# EAGLE board parallel (EAGLE 5.02)
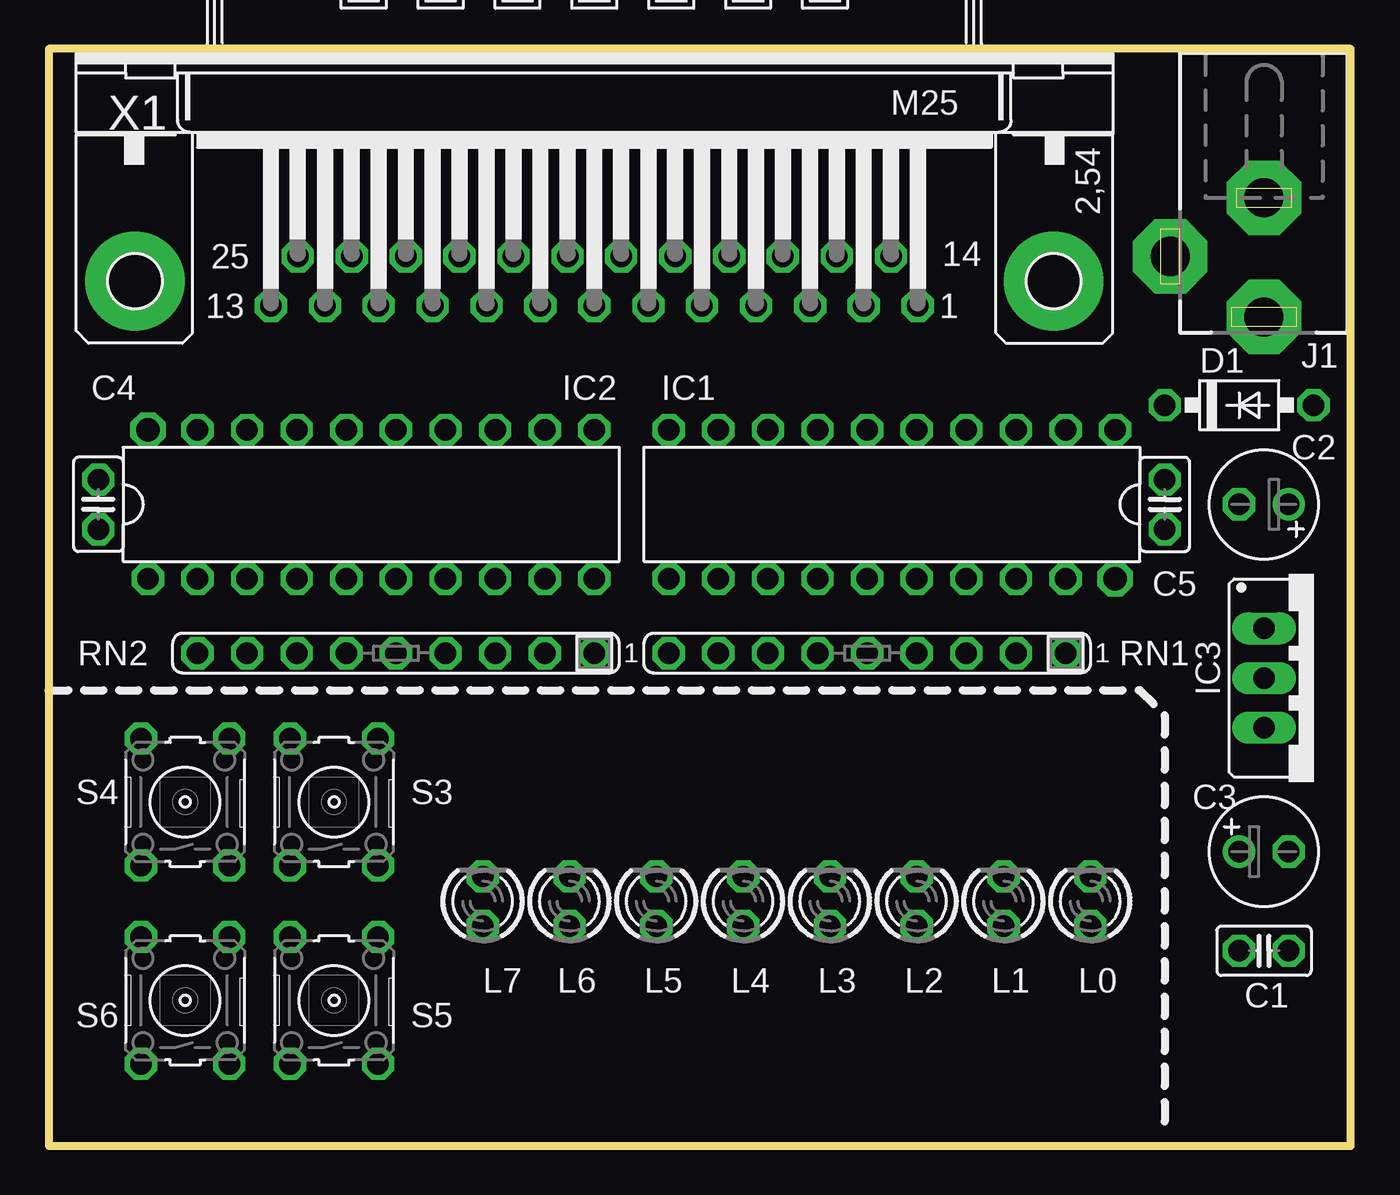
[diagram p0: board, top side]
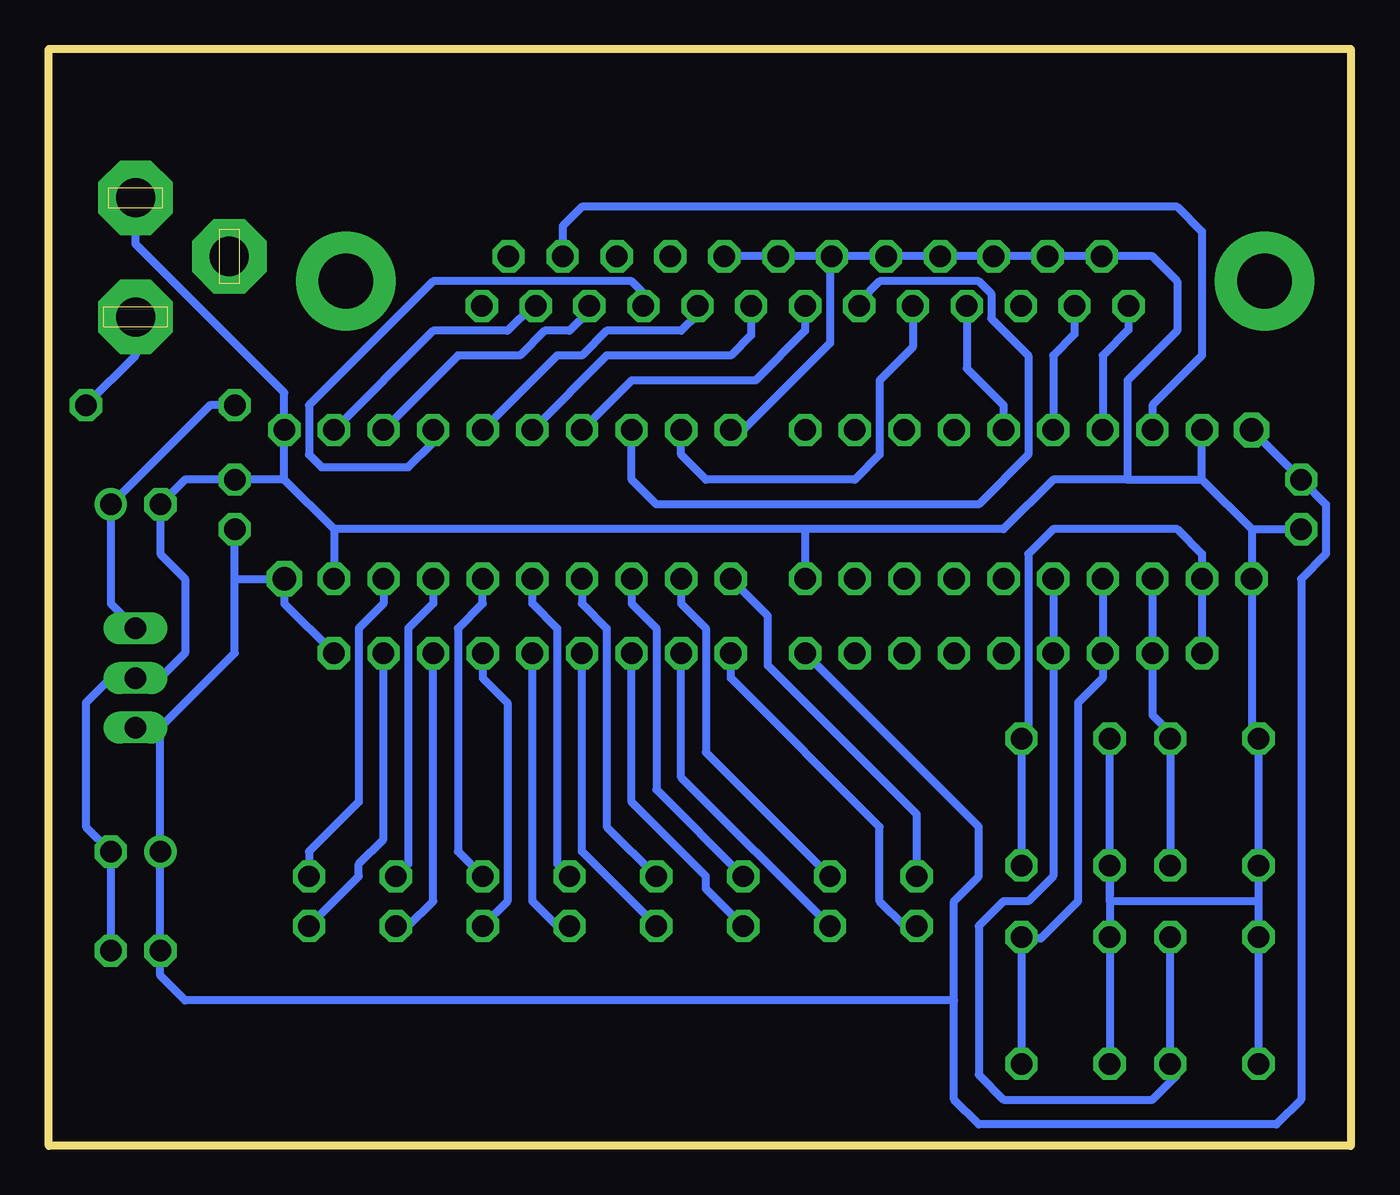
[diagram p1: board, bottom side, seen from below]

Size 66.67 x 56.19 mm. Coordinates in mm from the lower left corner, seen from the top.
Outline: 0,56.19 0,0 66.67,0 66.67,56.19 0,56.19
Copper layers (1*16): Top 0.035mm / dielectric 1.5mm / Bottom 0.035mm
Design rules "default": minimum track width 10mil, minimum drill 24mil, track to track 8mil, track to pad 8mil, pad to pad 8mil, via to via 8mil, smd to smd 8mil, copper to edge 40mil, drill to drill 8mil, minimum pad ring 10mil, minimum via ring 8mil, stop-mask expansion 4mil, vias tented up to drill 0mil, thermal gap 10mil

## Footprints (pad centres in the part's own frame; a part is rotated, then mirrored left to right if it is on the bottom)
C025-025X050 = drill 1.1 octagon: 1 -1.27,0; 2 1.27,0
E2,5-6 = drill 1.1 round: + -1.27,0 | drill 1.1 pad 1.6 octagon: - 1.27,0
DO41-10 = drill 1.1 octagon: A 3.81,0; C -3.81,0
DIL20 = drill 1.1 octagon: 1 -11.43,-3.81; 2 -8.89,-3.81; 3 -6.35,-3.81; 4 -3.81,-3.81; 5 -1.27,-3.81; 6 1.27,-3.81; 7 3.81,-3.81; 8 6.35,-3.81; 9 8.89,-3.81; 10 11.43,-3.81; 11 11.43,3.81; 12 8.89,3.81; 13 6.35,3.81; 14 3.81,3.81; 15 1.27,3.81; 16 -1.27,3.81; 17 -3.81,3.81; 18 -6.35,3.81; 19 -8.89,3.81 | drill 1.2 octagon: 20 -11.43,3.81
78XXS = drill 1.1 long: GND 0,-2.54; IN -2.54,-2.54; OUT 2.54,-2.54
DCJ0202A = drill 2 pad 3.81 octagon: 1 0,3.1; 2 4.8,0; 3 0,-3
LED3MM = drill 1.1 octagon: A -1.27,0; K 1.27,0
SIL9 = drill 1.1 octagon: 1 -10.16,0; 2 -7.62,0; 3 -5.08,0; 4 -2.54,0; 5 0,0; 6 2.54,0; 7 5.08,0; 8 7.62,0; 9 10.16,0
B3F-10XX = drill 1.1 octagon: 1 -3.251,2.261; 2 3.251,2.261; 3 -3.251,-2.261; 4 3.251,-2.261
M25HP = drill 1.1 octagon: 1 -16.561,1.27; 2 -13.792,1.27; 3 -11.049,1.27; 4 -8.28,1.27; 5 -5.512,1.27; 6 -2.769,1.27; 7 0,1.27; 8 2.769,1.27; 9 5.512,1.27; 10 8.28,1.27; 11 11.049,1.27; 12 13.792,1.27; 13 16.561,1.27; 14 -15.189,-1.27; 15 -12.421,-1.27; 16 -9.652,-1.27; 17 -6.909,-1.27; 18 -4.14,-1.27; 19 -1.372,-1.27; 20 1.372,-1.27; 21 4.14,-1.27; 22 6.909,-1.27; 23 9.652,-1.27; 24 12.421,-1.27; 25 15.189,-1.27 | drill 2.8 pad 5.08 round: G1 -23.52,0; G2 23.52,0

## Placement (x,y rotation side)
C1  [C025-025X050]  62.22,10 0 top
C2  [E2,5-6]  62.22,32.86 180 top
C3  [E2,5-6]  62.22,15.08 0 top
C4  [C025-025X050]  2.54,32.86 270 top
C5  [C025-025X050]  57.14,32.86 90 top
D1  1N4004A  [DO41-10]  60.95,37.94 0 top
IC1  74LS541N  [DIL20]  43.17,32.86 180 top
IC2  74LS541N  [DIL20]  16.51,32.86 0 top
IC3  [78XXS]  64.77,23.96 270 top
J1  DCJ0202  [DCJ0202A]  62.22,45.55 180 top
L0  [LED3MM]  53.34,12.54 90 top
L1  [LED3MM]  48.89,12.54 90 top
L2  [LED3MM]  44.45,12.54 90 top
L3  [LED3MM]  40,12.54 90 top
L4  [LED3MM]  35.55,12.54 90 top
L5  [LED3MM]  31.11,12.54 90 top
L6  [LED3MM]  26.67,12.54 90 top
L7  [LED3MM]  22.22,12.54 90 top
RN1  [SIL9]  41.9,25.23 180 top
RN2  [SIL9]  17.78,25.23 180 top
S3  [B3F-10XX]  14.6,17.62 90 top
S4  [B3F-10XX]  6.98,17.62 90 top
S5  [B3F-10XX]  14.6,7.46 90 top
S6  [B3F-10XX]  6.98,7.46 90 top
X1  [M25HP]  27.94,44.29 180 top

## Library data of the parts
C1-C5 D1 IC1-IC3 J1 L0 L1-L7 RN1 RN2 S3-S6 X1 = parallel

## Nets
+5V: C1.1 C3.+ C4.1 C5.1 IC1.20 IC2.20 IC3.OUT RN1.1 RN2.1
GND: C1.2 C2.- C3.- C4.2 C5.2 IC1.1 IC1.10 IC1.19 IC2.1 IC2.10 IC2.19 IC3.GND J1.3 S3.1 S3.2 S4.1 S4.2 S5.1 S5.2 S6.1 S6.2 X1.18 X1.19 X1.20 X1.21 X1.22 X1.23 X1.24 X1.25
N$1: IC1.2 X1.2
N$2: IC1.3 X1.3
N$3: IC1.4 X1.4
N$4: IC1.5 X1.5
N$5: IC1.6 X1.6
N$6: IC1.7 X1.7
N$7: IC1.8 X1.8
N$8: IC1.9 X1.9
N$9: IC1.18 L0.K
N$10: IC1.17 L1.K
N$11: IC1.16 L2.K
N$12: IC1.15 L3.K
N$13: IC1.14 L4.K
N$14: IC1.13 L5.K
N$15: IC1.12 L6.K
N$16: IC1.11 L7.K
N$17: L0.A RN1.2
N$18: L1.A RN1.3
N$19: L2.A RN1.4
N$20: L3.A RN1.5
N$21: L4.A RN1.6
N$22: L5.A RN1.7
N$23: L6.A RN1.8
N$24: L7.A RN1.9
N$25: IC2.2 RN2.9 S3.3 S3.4
N$26: IC2.3 RN2.8 S4.3 S4.4
N$27: IC2.4 RN2.7 S5.3 S5.4
N$28: IC2.5 RN2.6 S6.3 S6.4
N$33: IC2.15 X1.10
N$34: IC2.16 X1.12
N$35: IC2.17 X1.13
N$36: IC2.18 X1.15
N$37: D1.A J1.1
N$38: C2.+ D1.C IC3.IN

## Tracks (layer width: path | path; a pad name or v marks a point on that pad's centre or on a via)
+5V
  Bottom 0.406: C1.1 C3.+ 60.95,21.43 | 57.14,29.05 C5.1 | 60.95,21.43 IC3.OUT | IC2.20 C4.1 1.27,32.86 1.27,30.32 2.54,29.05 2.54,2.38 3.81,1.1 19.05,1.1 20.32,2.38 20.32,7.46 | 20.32,7.46 20.32,12.54 19.05,13.81 19.05,16.35 RN2.1 | RN1.1 54.6,27.78 IC1.20 57.14,29.05 | 57.14,29.05 57.14,25.23 60.95,21.43 | C1.1 60.95,21.43 | C1.1 60.95,8.73 59.68,7.46 20.32,7.46
GND
  Bottom 0.406: C1.2 C3.- 64.77,16.35 64.77,22.7 63.49,23.96 IC3.GND 60.95,23.96 59.68,25.23 59.68,29.05 60.95,30.32 C2.- 59.68,34.12 C5.2 54.6,34.12 | 4.52,20.87 4.44,20.79 | 4.52,20.87 S4.2 4.72,14.8 5.08,14.44 5,14.36 S4.1 4.72,12.54 | 4.52,20.87 5.08,21.43 IC2.1 5.08,31.59 | 4.52,10.71 4.44,10.63 | 4.52,10.71 S6.2 4.72,4.56 4.44,4.28 4.52,4.2 S6.1 | 4.72,12.54 4.72,10.91 4.52,10.71 | S3.1 12.14,14.36 12.06,14.44 12.34,14.72 S3.2 | 12.14,10.71 12.06,10.63 | 12.14,10.71 S5.2 12.34,4.56 12.06,4.28 12.14,4.2 S5.1 | 12.34,12.54 S3.1 | 12.34,12.54 12.34,10.91 12.14,10.71 | S3.1 12.34,12.81 | 4.72,12.54 12.34,12.54 | J1.3 62.22,46.19 54.6,38.57 IC1.1 54.6,34.12 | 52.06,31.59 54.6,34.12 | 52.06,31.59 IC1.19 | 27.94,31.59 52.06,31.59 | 27.94,31.59 IC2.10 | 27.94,31.59 17.78,31.59 15.23,34.12 11.42,34.12 | 11.42,34.12 7.62,34.12 | 5.08,31.59 C4.2 | 7.62,34.12 5.08,31.59 | 7.62,34.12 IC2.19 | 11.42,34.12 11.42,39.2 8.88,41.74 8.88,44.29 10.15,45.55 X1.25 X1.24 X1.23 X1.22 X1.21 26.67,45.55 | 26.67,45.55 X1.20 | 26.67,45.55 X1.19 X1.18 | 26.67,45.55 26.67,41.11 31.11,36.66 IC1.10
N$1
  Bottom 0.406: X1.2 41.9,43.02 43.17,41.74 46.98,41.74 IC1.2
N$2
  Bottom 0.406: X1.3 38.98,42.76 40,41.74 41.27,41.74 42.54,40.48 45.71,40.48 IC1.3
N$3
  Bottom 0.406: IC1.4 46.98,36.03 48.25,34.76 52.7,34.76 53.34,35.4 53.34,37.94 46.98,44.29 36.82,44.29 36.19,43.65 36.19,43.02 X1.4
N$4
  Bottom 0.406: X1.5 33.45,42.58 34.28,41.74 38.09,41.74 39.36,40.48 40.63,40.48 IC1.5
N$5
  Bottom 0.406: X1.6 30.7,41.52 31.75,40.48 38.09,40.48 IC1.6
N$6
  Bottom 0.406: X1.7 27.94,41.74 30.48,39.2 36.82,39.2 IC1.7
N$7
  Bottom 0.406: X1.8 25.17,43.24 24.12,44.29 19.05,44.29 18.41,43.65 18.41,42.38 16.51,40.48 16.51,35.4 19.05,32.86 35.55,32.86 36.82,34.12 IC1.8
N$8
  Bottom 0.406: X1.9 22.42,40.91 24.12,39.2 24.12,35.4 25.39,34.12 33.02,34.12 34.28,35.4 IC1.9
N$9
  Bottom 0.406: IC1.18 49.52,27.78 50.79,26.51 50.79,17.62 53.34,15.08 L0.K
N$10
  Bottom 0.406: IC1.17 46.98,27.78 48.25,26.51 48.25,14.44 L1.K
N$11
  Bottom 0.406: L2.K 45.71,15.08 45.71,26.51 44.45,27.78 IC1.16
N$12
  Bottom 0.406: L3.K 40.63,14.44 40.63,26.51 41.9,27.78 IC1.15
N$13
  Bottom 0.406: L4.K 38.09,16.35 38.09,26.51 39.36,27.78 IC1.14
N$14
  Bottom 0.406: L5.K 35.55,18.25 35.55,26.51 36.82,27.78 IC1.13
N$15
  Bottom 0.406: IC1.12 34.28,27.78 33.02,26.51 33.02,20.16 L6.K
N$16
  Bottom 0.406: L7.K 22.22,16.98 29.84,24.6 29.84,27.14 IC1.11
N$17
  Bottom 0.406: L0.A 50.79,13.81 50.79,14.44 49.52,15.71 RN1.2
N$18
  Bottom 0.406: L1.A 48.25,11.27 46.98,12.54 RN1.3
N$19
  Bottom 0.406: L2.A 43.17,12.54 43.17,22.7 44.45,23.96 RN1.4
N$20
  Bottom 0.406: L3.A 40.63,11.27 41.9,12.54 RN1.5
N$21
  Bottom 0.406: L4.A 39.36,15.08 RN1.6
N$22
  Bottom 0.406: L5.A 33.02,13.17 33.02,13.81 36.82,17.62 RN1.7
N$23
  Bottom 0.406: L6.A 34.28,18.89 RN1.8
N$24
  Bottom 0.406: L7.A 22.86,11.27 24.12,12.54 24.12,16.35 31.75,23.96 RN1.9
N$25
  Bottom 0.406: IC2.2 RN2.9 IC2.2 | IC2.2 7.62,30.32 8.88,31.59 15.23,31.59 16.51,30.32 16.51,21.43 17.06,20.87 | 17.06,20.87 17.14,20.79 | 17.06,20.87 S3.4 16.86,14.8 16.51,14.44 16.58,14.36 S3.3
N$26
  Bottom 0.406: IC2.3 RN2.8 10.15,22.06 8.96,20.87 | 8.96,20.87 8.88,20.79 | 8.96,20.87 S4.4 9.24,14.72 9.52,14.44 9.44,14.36 S4.3
N$27
  Bottom 0.406: IC2.4 RN2.7 12.69,23.96 13.96,22.7 13.96,12.54 15.87,10.63 16.51,10.63 16.58,10.71 S5.4 16.86,4.56 17.14,4.28 17.06,4.2 S5.3
N$28
  Bottom 0.406: IC2.5 RN2.6 15.23,13.81 16.51,12.54 17.78,12.54 19.05,11.27 19.05,3.65 17.78,2.38 10.15,2.38 8.88,3.65 9.44,4.2 | 9.44,4.2 9.52,4.28 | 9.44,4.2 S6.3 9.24,10.35 9.52,10.63 9.44,10.71 S6.4
N$33
  Bottom 0.406: X1.10 19.66,39.81 17.78,37.94 IC2.15
N$34
  Bottom 0.406: X1.12 14.14,41.57 15.23,40.48 IC2.16
N$35
  Bottom 0.406: X1.13 11.37,41.8 12.69,40.48 IC2.17
N$36
  Bottom 0.406: IC2.18 10.15,37.94 7.62,40.48 7.62,46.83 8.88,48.09 39.36,48.09 40.36,47.1 X1.15
N$37
  Bottom 0.406: J1.1 62.22,40.48 D1.A
N$38
  Bottom 0.406: D1.C 58.41,37.94 C2.+ 63.49,27.78 IC3.IN